# Altium PCB servoboard.PcbDoc
Units mil, origin at the board's own origin, x right, y up, seen from the top; angles counter-clockwise.
Board outline 3175.08 x 1402.53 mil, 2 copper layers (Top Layer, Bottom Layer); 56 components, 46 nets, 170 pads, 9 vias.
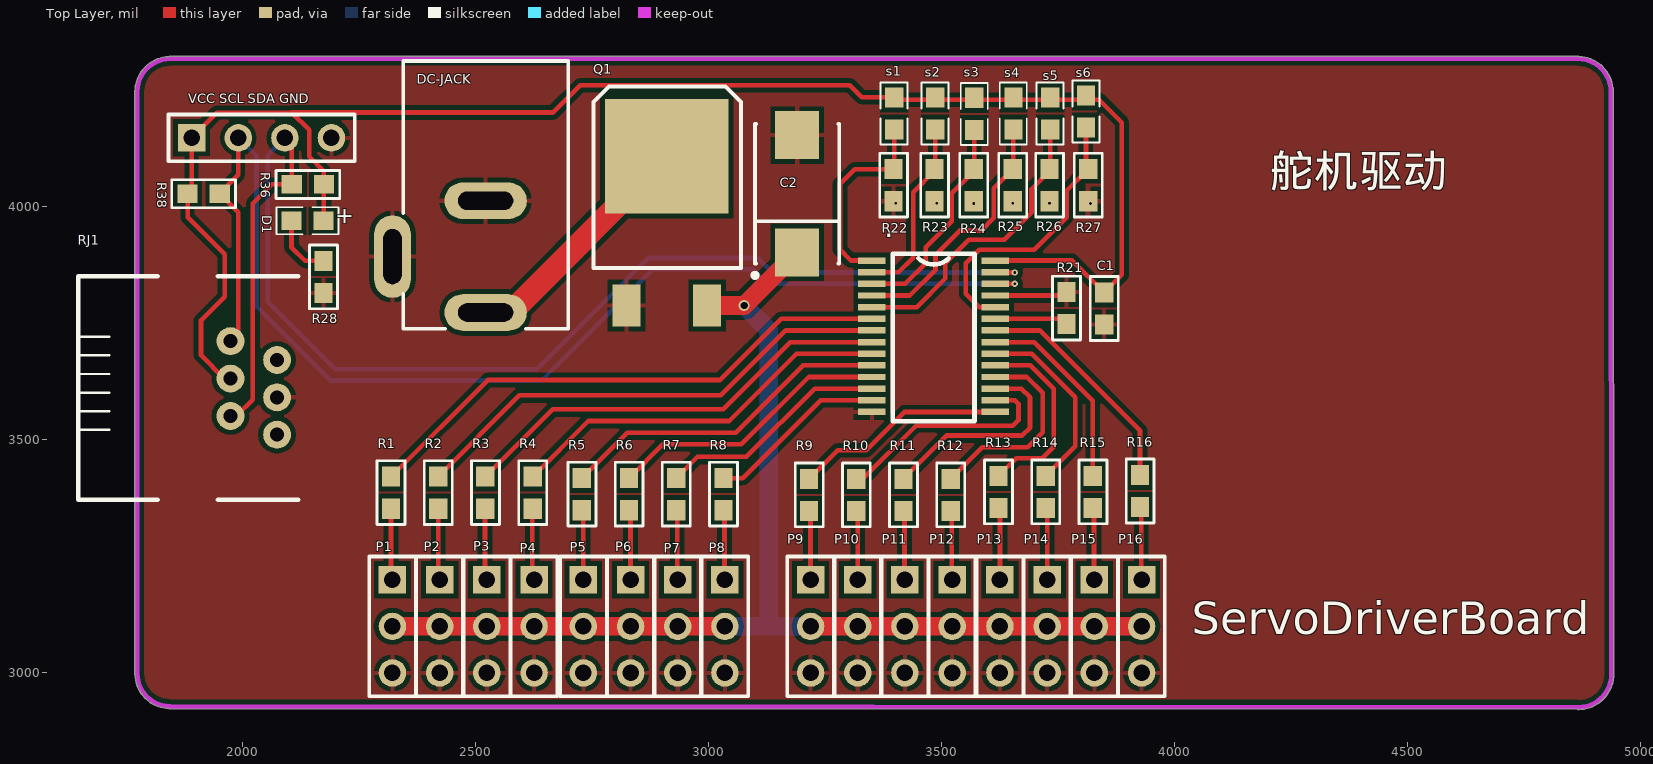
[diagram p0: Top Layer view]
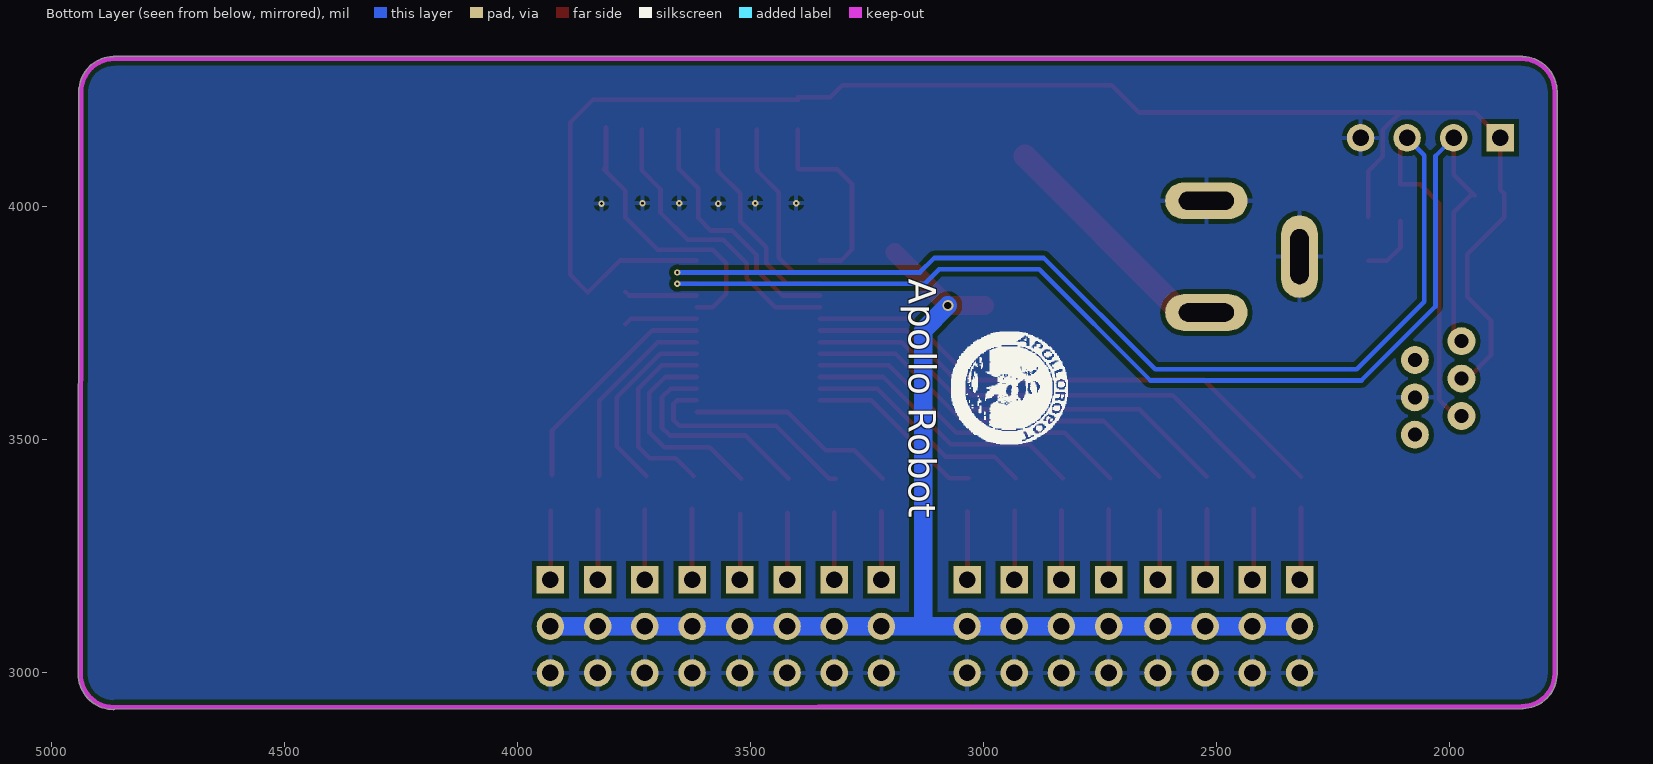
[diagram p1: Bottom Layer view, seen from below]

## Layer stack, top to bottom
Top Layer: signal copper 1.4
Dielectric: dielectric 12.6, FR-4, Dk 4.8
Bottom Layer: signal copper 1.4

## Board outline
1841.31,2922.52 cw(c1843.5,2998) 1768.01,2996.13 cw(c1772.95,2997) 1767.93,2997 1767.93,4247 cw(c1772.95,4247) 1767.99,4247.75 cw(c1843.5,4247) 1841.25,4322.48 cw(c1843.5,4318) 1843.5,4323.02 4866.5,4323.02 cw(c4866.5,4318) 4868.75,4322.48 cw(c4866.5,4247) 4941.5,4255.79 cw(c4936.82,4254) 4941.83,4254 4941.83,4252.23 cw(c4866.5,4247) 4942.02,4247 cw(c4937,4247) 4941.84,4245.69 4943.02,2996 cw(c4938,2996) 4943.02,2996 cw(c4867.5,2996) 4867.5,2920.49 cw(c4867.5,2925.5) 4866.03,2920.7 1843.5,2922.02 cw(c1843.5,2927.03)

## Design rules (kind name [scope] priority, off if disabled: settings)
Clearance [All] p1: gap=10
HoleSize [All] p1: absolutevalues=TRUE maxlimit=200 minlimit=1 maxpercent=80.000 minpercent=20.000
HoleToHoleClearance [All] p1: gap=0 allowstackedmicrovias=TRUE
MinimumSolderMaskSliver [All] p1: minsoldermaskwidth=0
PlaneClearance [All] p1: clearance=10
PolygonConnect [All] p1: connectstyle=Relief reliefconductorwidth=10 reliefentries=4 polygonreliefangle="90 Angle" airgapwidth=10
RoutingVias [All] p1: holewidth=28 width=50 viastyle="Through Hole" minholewidth=28 minwidth=50 maxholewidth=28 maxwidth=50
SilkToSilkClearance [All] p1: silktosilkclearance=0
SilkToSolderMaskClearance SilkscreenOverComponentPads [IsPad] p1: minsilkscreentomaskgap=0 clearancetoexposedcopper=TRUE
SolderMaskExpansion [All] p1: expansion=4
Width APOLLO [InPolygon] p1: maxlimit=50 minlimit=10 preferedwidth=10
Width [All] p2: maxlimit=1000 minlimit=10 preferedwidth=10
22 further rules are at their usual default settings.

## Components (designator, comment, footprint, x,y, rotation, side; value= is the part's Value field where it differs from the comment)
. "PCA9685PW" TSSOP-28 3483,3722 r0 top (schematic designator pp1)
C1 "Capacitor" C0805 3849,3747 r90 top
C2 "Cap Pol3" TC7343-E 3190,4028 r90 top
D1 "LED" C0603 2173,3970 r180 top (schematic designator LED1)
DC-JACK "3P" DC-JACK-005 2421,3893 r90 top
P1 "Header 3H" HDR1X3 2321,3199 r270 top
P2 "Header 3H" HDR1X3 2422.33,3199 r270 top
P3 "Header 3H" HDR1X3 2523.67,3199 r270 top
P4 "Header 3H" HDR1X3 2625,3199 r270 top
P5 "Header 3H" HDR1X3 2730.82,3199 r270 top
P6 "Header 3H" HDR1X3 2832.15,3199 r270 top
P7 "Header 3H" HDR1X3 2933.49,3199 r270 top
P8 "Header 3H" HDR1X3 3034.82,3199 r270 top
P9 "Header 3H" HDR1X3 3218.67,3199 r270 top
P10 "Header 3H" HDR1X3 3320,3199 r270 top
P11 "Header 3H" HDR1X3 3421.33,3199 r270 top
P12 "Header 3H" HDR1X3 3522.67,3199 r270 top
P13 "Header 3H" HDR1X3 3625.33,3199 r270 top
P14 "Header 3H" HDR1X3 3726.67,3199 r270 top
P15 "Header 3H" HDR1X3 3828,3199 r270 top
P16 "Header 3H" HDR1X3 3929.33,3199 r270 top
Q1 "AOD417" TO-252 2910,3788 r0 top
R1 "Resistor" R0603 2318,3351.82 r90 top
R2 "Resistor" R0603 2419.33,3351.82 r90 top
R3 "Resistor" R0603 2520.67,3351.82 r90 top
R4 "Resistor" R0603 2622,3351.82 r90 top
R5 "Resistor" R0603 2727.82,3348.58 r90 top
R6 "Resistor" R0603 2829.15,3348.58 r90 top
R7 "Resistor" R0603 2930.49,3348.58 r90 top
R8 "Resistor" R0603 3031.82,3348.58 r90 top
R9 "Resistor" R0603 3215.67,3347 r90 top
R10 "Resistor" R0603 3317,3347 r90 top
R11 "Resistor" R0603 3418.33,3347 r90 top
R12 "Resistor" R0603 3519.67,3347 r90 top
R13 "Resistor" R0603 3622.33,3353.3 r90 top
R14 "Resistor" R0603 3723.67,3353.3 r90 top
R15 "Resistor" R0603 3825,3353.3 r90 top
R16 "Resistor" R0603 3926.33,3355.3 r90 top
R21 "Resistor" R0603 3768,3817 r270 top
R22 "Resistor" R0603 3397,4012 r90 top
R23 "Resistor" R0603 3485,4012 r90 top
R24 "Resistor" R0603 3569,4012 r90 top
R25 "Resistor" R0603 3653,4012 r90 top
R26 "Resistor" R0603 3732,4012 r90 top
R27 "Resistor" R0603 3815,4012 r90 top
R28 "Resistor" R0603 2173,3815 r90 top
R36 "Resistor" R0603 2105,4048 r0 top
R38 "Resistor" R0603 1950,4028 r180 top
RJ1 "RJ12 port" RJ12-S-12X15X14.5 1973,3601 r270 top locked
s1 "shortcut" C0603 3398,4235 r270 top
s2 "shortcut" C0603 3486,4235 r270 top
s3 "shortcut" C0603 3570,4234 r270 top
s4 "shortcut" C0603 3654,4235 r270 top
s5 "shortcut" C0603 3733,4235 r270 top
s6 "shortcut" C0603 3810,4239 r270 top
"VCC SCL SDA GND" "HDR4" HDR1X4 1890,4148 r0 top (schematic designator HDR1)

## Footprints (in the part's own frame and the unit in brackets; to place one, negate y for a bottom-side part, rotate by r counter-clockwise, add the part's x,y. Pads: shape width x height; smd on the part's side, far side on the other; paste and mask are expansions set on the pad)
C0603 [mm] "Caparitor 0603"
  rect 1.1x1 smd: 1(0.001,0.006) 2(1.751,0.006)
  silkscreen extent -0.81,-0.74 2.57,0.74
C0805 [mm] "Caparitor 0805"
  rect 1.1x1 smd: 1(0,0) 2(1.75,0)
  silkscreen extent -0.86,-0.77 2.62,0.76
DC-JACK-005 [mm] "引脚针直径2.5mm, 插槽孔"
  oval 2x4.5 hole 1 slot 3 at 90 deg: 1(-3.048,-2.54) 2(3.048,-2.54)
  oval 4.5x2 hole 1 slot 3 at 0 deg: 3(0,2.54)
  silkscreen extent -3.93,-7.04 10.67,1.96, body extent -3.94,-6.98 10.67,1.91, height 11
HDR1X3 [mm]
  rect 1.5x1.5 hole 0.9: 1(0,0)
  round 1.5 hole 0.9: 2(2.54,0) 3(5.08,0)
  silkscreen extent -1.27,-1.27 6.35,1.27
HDR1X4 [mm]
  rect 1.5x1.5 hole 0.9: 1(0,0)
  round 1.5 hole 0.9: 2(2.54,0) 3(5.08,0) 4(7.62,0)
  silkscreen extent -1.27,-1.27 8.89,1.27
R0603 [mm] "Resistor 0603"
  rect 1.1x1 smd: 1(-0.003,0.005) 2(1.747,0.005)
  silkscreen extent -0.86,-0.76 2.62,0.76
RJ12-S-12X15X14.5 [mil] "RJ12 socket"
  round 94.49 on Mech1: 0(-246,-90.28) 1(226.22,-90.28)
  round 60 hole 30: 1(-110.39,0.28) 2(-70.24,100.28) 3(-30.08,0.28) 4(10.08,100.28) 5(50.24,0.28) 6(90.39,100.28)
  silkscreen extent -250,-326 230,146
TC7343-E [mm] "Capacitor, SM Tantalum; Body 7.3 x 4.3 mm (LxW typ)"
  rect 2.6x2.4 smd: 1(-3.2,0) 2(3.2,0)
  silkscreen extent -4.57,-2.3 3.8,2.42
TO-252 [mm] "DPAK"
  rect 1.524x2.28 smd: 1(-2.2,0) 3(2.2,0)
  rect 6.74x6.23 smd: 2(0,8.14)
  silkscreen extent -4,2.05 4.05,11.95, body extent -3.24,-0.5 3.26,10.5, height 2.2
TSSOP-28 [mil] "Shrink Small Outline; 28 Leads; Body Width 4.4 mm;"
  rect 59.06x13.78 smd: 1(-132.5,162.5) 2(-132.5,137.5) 3(-132.5,112.5) 4(-132.5,87.5) 5(-132.5,62.5) 6(-132.5,37.5) 7(-132.5,12.5) 8(-132.5,-12.5) 9(-132.5,-37.5) 10(-132.5,-62.5) 11(-132.5,-87.5) 12(-132.5,-112.5) 13(-132.5,-137.5) 14(-132.5,-162.5) 15(132.5,-162.5) 16(132.5,-137.5) 17(132.5,-112.5) 18(132.5,-87.5) 19(132.5,-62.5) 20(132.5,-37.5) 21(132.5,-12.5) 22(132.5,12.5) 23(132.5,37.5) 24(132.5,62.5) 25(132.5,87.5) 26(132.5,112.5) 27(132.5,137.5) 28(132.5,162.5)
  silkscreen extent -88,-182 88,178

## Part data
C2: "Polarized Capacitor (Surface Mount)"
D1: library part LED-SM, "LED  SMD"
P1 P2 P3 P4 P5 P6 P7 P8 P9 P10 P11 P12 P13 P14 P15 P16: "Header, 3-Pin, Right Angle"
Q1: library part MOSFET-P, "P-Channel MOSFET"
RJ1: library part RJ12
"VCC SCL SDA GND": library part HDR4-2.54mm, "Header  4pin"

## Free pads (board coordinates)
  round 196.85 on Mech1: 4(4122.3,3456.51) 4(4122.3,3771.47) 4(4437.26,3456.51) 4(4437.26,3771.47) 4(4752.22,3456.51) 4(4752.22,3771.47)

## Via types
v1: diameter 13.62, hole 5.75, Top Layer to Bottom Layer, 8 vias
v2: diameter 23.62, hole 15.75, Top Layer to Bottom Layer, 1 vias

## Nets (pads, with @x,y where several pads share a name; then routed paths per layer and width w, separated by ;. In a path a pad name is that pad's centre, name@x,y a point inside that pad or via, vN(x,y) a via of type N, cw(c..) or ccw(c..) an arc to the next point about the centre after c; other vN are vias at no path point)
A0: ..1 R22.2 s1.2 | length 433.1
  Top Layer w10: ..1 3305.5,3884.5 3282,3908 3282,4049 3313.78,4080.78 R22.2 3398.23,4082.19 s1.2
A1: ..2 R23.2 s2.2 | length 392.2
  Top Layer w10: ..2 3407.5,3859.5 3439,3891 3439,4030.96 R23.2@3484.82,4076.78 ; R23.2 3486.23,4082.19 s2.2
A2: ..3 R24.2 s3.2 | length 468.2
  Top Layer w10: ..3 3421.5,3834.5 3466,3879 3466,3913 3522,3969 3522,4028.96 R24.2@3568.82,4075.78 ; R24.2 R24.2@3568.82,4075.78 ; s3.2 3570.23,4077.19 R24.2@3568.82,4075.78
A3: ..4 R25.2 s4.2 | length 556.2
  Top Layer w10: ..4 3431.5,3809.5 3487,3865 3487,3897 3539,3949 3585,3949 3612,3976 3612,4039.96 R25.2 ; R25.2@3654.23,4080.78 s4.2
A4: ..5 R26.2 s5.2 | length 641.5
  Top Layer w10: ..5 3446.5,3784.5 3508,3846 3508,3879 3558,3929 3635,3929 3693,3987 3693,4037.96 3733.23,4078.19 s5.2
A5: ..24 R27.2 s6.2 | length 615
  Top Layer w10: ..24 3580.5,3784.5 3552,3813 3552,3879 3581,3908 3699,3908 3769,3978 3769,4034.96 R27.2@3810.23,4076.19 ; s6.2 R27.2@3810.23,4076.19 ; R27.2 R27.2@3810.23,4076.19
GND: "VCC SCL SDA GND.4" ..14 ..25 C1.1 C2.2 DC-JACK.2 DC-JACK.3 P1.3 P2.3 P3.3 P4.3 P5.3 P6.3 P7.3 P8.3 P9.3 P10.3 P11.3 P12.3 P13.3 P14.3 P15.3 P16.3 Q1.1 R21.1 R22.1 R23.1 R24.1 R25.1 R26.1 R27.1 R28.1 RJ1.4 | length 155.8
  Top Layer w10: ..25 3760.56,3809.5 R21.1
  other v1: 3568.82,4006.88 3819.82,4006.88 3401.82,4007.89 3489.82,4007.89 3652.82,4007.88 3731.82,4007.88
NetDC-JACK_1: DC-JACK.1 Q1.2 | length 528
  Top Layer w50: DC-JACK.1 2574.53,3773 Q1.2
NetLED1_2: D1.2 R28.2 | length 137.7
  Top Layer w10: D1.2 2104.08,3912.92 2133.22,3883.78 R28.2
NetP1_1: P1.1 R1.1 | length 151.7
  Top Layer w10: P1.1@2317.82,3202 R1.1@2317.82,3353.7
NetP2_1: P2.1 R2.1 | length 149.7
  Top Layer w10: P2.1@2419.15,3202 R2.1
NetP3_1: P3.1 R3.1 | length 151.7
  Top Layer w10: P3.1@2519.67,3199 R3.1@2519.67,3350.7
NetP4_1: P4.1 R4.1 | length 149.7
  Top Layer w10: P4.1@2621,3199 R4.1@2621,3348.7
NetP5_1: P5.1 R5.1 | length 151.7
  Top Layer w10: P5.1 R5.1@2730.82,3350.7
NetP6_1: P6.1 R6.1 | length 149.7
  Top Layer w10: P6.1 R6.1@2832.15,3348.7
NetP7_1: P7.1 R7.1 | length 151.7
  Top Layer w10: P7.1@2932.67,3196 R7.1@2932.67,3347.7
NetP8_1: P8.1 R8.1 | length 149.7
  Top Layer w10: P8.1@3034,3196 R8.1@3034,3345.7
NetP9_1: P9.1 R9.1 | length 151.7
  Top Layer w10: P9.1@3218.67,3194 R9.1@3218.67,3345.7
NetP10_1: P10.1 R10.1 | length 149.7
  Top Layer w10: P10.1@3320,3194 R10.1@3320,3343.7
NetP11_1: P11.1 R11.1 | length 151.7
  Top Layer w10: P11.1@3420.51,3191 R11.1@3420.51,3342.7
NetP12_1: P12.1 R12.1 | length 149.7
  Top Layer w10: P12.1@3521.85,3191 R12.1@3521.85,3340.7
NetP13_1: P13.1 R13.1 | length 151.7
  Top Layer w10: P13.1@3625.33,3200.3 R13.1@3625.33,3352
NetP14_1: P14.1 R14.1 | length 149.7
  Top Layer w10: P14.1@3726.67,3200.3 R14.1@3726.67,3350
NetP15_1: P15.1 R15.1 | length 151.7
  Top Layer w10: P15.1@3827.18,3197.3 R15.1@3827.18,3349
NetP16_1: P16.1 R16.1 | length 149.7
  Top Layer w10: P16.1@3928.51,3197.3 R16.1@3928.51,3347
OE: ..23 R21.2 | length 157.4
  Top Layer w10: ..23 3756.9,3759.5 R21.2
PWM0: ..6 R1.2 | length 1173.1
  Top Layer w10: R1.2 2525.22,3628 3024,3628 3155.5,3759.5 ..6
PWM1: ..7 R2.2 | length 1061.4
  Top Layer w10: R2.2 2593.55,3595 3026,3595 3165.5,3734.5 ..7
PWM2: ..8 R3.2 | length 949.7
  Top Layer w10: R3.2 2664.89,3565 3031,3565 3175.5,3709.5 ..8
PWM3: ..9 R4.2 | length 838
  Top Layer w10: R4.2 2741.22,3540 3044,3540 3188.5,3684.5 ..9
PWM4: ..10 R5.2 | length 723.2
  Top Layer w10: R5.2 2825.28,3515 3058,3515 3202.5,3659.5 ..10
PWM5: ..11 R6.2 | length 611.5
  Top Layer w10: R6.2 2901.61,3490 3070,3490 3214.5,3634.5 ..11
PWM6: ..12 R7.2 | length 499.8
  Top Layer w10: R7.2 2975.94,3463 3081,3463 3227.5,3609.5 ..12
PWM7: ..13 R8.2 | length 388.1
  Top Layer w10: R8.2 3073.36,3417.36 3240.5,3584.5 ..13
PWM8: ..15 R9.2 | length 459.5
  Top Layer w10: R9.2 3276.71,3477 3338,3477 3420.5,3559.5 ..15
PWM9: ..16 R10.2 | length 488.1
  Top Layer w10: R10.2 3330.78,3415.78 3445,3530 3653,3530 3665,3542 3665,3577 3657.5,3584.5 ..16
PWM10: ..17 R11.2 | length 464.7
  Top Layer w10: R11.2 3511.37,3509 3673,3509 3690,3526 3690,3591 3671.5,3609.5 ..17
PWM11: ..18 R12.2 | length 439
  Top Layer w10: R12.2 3587.71,3484 3685,3484 3717,3516 3717,3600.28 3682.78,3634.5 ..18
PWM12: ..19 R13.2 | length 415.3
  Top Layer w10: ..19 3690.5,3659.5 3741,3609 3741,3485 3716,3460 3660.07,3460 R13.2
PWM13: ..20 R14.2 | length 405.6
  Top Layer w10: ..20 3693.78,3684.5 3787,3591.28 3787,3485.59 R14.2
PWM14: ..21 R15.2 | length 422.9
  Top Layer w10: ..21 3698.78,3709.5 3824.82,3583.47 R15.2
PWM15: ..22 R16.2 | length 494.9
  Top Layer w10: ..22 3710.78,3734.5 3926.15,3519.13 R16.2
SCL: "VCC SCL SDA GND.2" ..26 R38.1 RJ1.1@1973.28,3711.39 | length 2707.8
  Top Layer w10: R38.1@1945.18,4024.12 1990,4068.94 1990,4148 ; R38.1 1990,3987.94 1990,3728.12 RJ1.1@1973.28,3711.39 ; ..26 3616,3835 v1(3657,3835)
  Bottom Layer w10: 1990,4148 2029,4109 2029,3786.06 2188.06,3627 2641,3627 2880,3866 3095,3866 3126,3835 v1(3657,3835)
SDA: "VCC SCL SDA GND.3" ..27 R36.1 RJ1.5 | length 2853.4
  Top Layer w10: RJ1.5 1985.76,3550.76 2021,3586 2021,4007 2062.18,4048.18 R36.1 2104.88,4133.12 ; ..27@3616,3859 v1(3657,3859)
  Bottom Layer w10: 2090,4148 2053,4111 2053,3796 2198,3651 2631.06,3651 2870.06,3890 3104.94,3890 3135.94,3859 v1(3657,3859)
VCC: "VCC SCL SDA GND.1" ..28 C1.2 D1.1 R36.2 R38.2 RJ1.3 s1.1 s2.1 s3.1 s4.1 s5.1 s6.1 | length 3580.2
  Top Layer w10: RJ1.3 1959.92,3631.08 1910,3681 1910,3756 1961,3807 1961,3898 1881.22,3977.78 R38.2 1890,4036.6 1890,4148 1944,4202 2105,4202 2142,4165 2142,4108 2173.78,4076.22 R36.2 D1.1@2173.78,3978.08 ; 2104.63,4202.37 2665.37,4202.37 2724,4261 3303,4261 3329.02,4234.98 s1.1 ; s1.1@3397,4229.98 3838.02,4229.98 3887,4181 3887,3853.9 C1.2 3780.4,3884.5 ..28
VM: C2.1 P1.2 P2.2 P3.2 P4.2 P5.2 P6.2 P7.2 P8.2 P9.2 P10.2 P11.2 P12.2 P13.2 P14.2 P15.2 P16.2 Q1.3 | length 3962.4
  Top Layer w40: P1.2 P2.2 P3.2 P4.2 P5.2 P6.2 P7.2 P8.2 ; Q1.3 v2(3075.98,3788) C2.1 ; P9.2 P10.2 P11.2 P12.2 P13.2 P14.2 P15.2 P16.2
  Bottom Layer w40: P1.2 P2.2 P3.2 P4.2 P5.2 P6.2 P7.2 P8.2 P9.2 P10.2 P11.2 P12.2 P13.2 P14.2 P15.2 P16.2 ; v2(3075.98,3788) 3129,3734.98 3129,3121
pads on no net: RJ1.0 RJ1.1@1882.72,3374.78 RJ1.2 RJ1.6

## Polygon pours and split planes (outlines as drawn)
GND on Top Layer "Top Layer-No Net" (solid, pour order 0): 1841.31,2922.52 cw(c1843.5,2998) 1768.01,2996.13 cw(c1772.95,2997) 1767.93,2997 1767.93,4247 cw(c1772.95,4247) 1767.99,4247.75 cw(c1843.5,4247) 1841.25,4322.48 cw(c1843.5,4318) 1843.5,4323.02 4866.5,4323.02 cw(c4866.5,4318) 4868.75,4322.48 cw(c4866.5,4247) 4941.5,4255.79 cw(c4936.82,4254) 4941.83,4254 4941.83,4252.23 cw(c4866.5,4247) 4942.02,4247 cw(c4937,4247) 4941.84,4245.69 4943.02,2996 cw(c4938,2996) 4943.02,2996 cw(c4867.5,2996) 4867.5,2920.49 cw(c4867.5,2925.5) 4866.03,2920.7 1843.5,2922.02 cw(c1843.5,2927.03)
GND on Bottom Layer "Top Layer-No Net" (solid, pour order 1): 1841.31,2922.52 cw(c1843.5,2998) 1768.01,2996.13 cw(c1772.95,2997) 1767.93,2997 1767.93,4247 cw(c1772.95,4247) 1767.99,4247.75 cw(c1843.5,4247) 1841.25,4322.48 cw(c1843.5,4318) 1843.5,4323.02 4866.5,4323.02 cw(c4866.5,4318) 4868.75,4322.48 cw(c4866.5,4247) 4941.5,4255.79 cw(c4936.82,4254) 4941.83,4254 4941.83,4252.23 cw(c4866.5,4247) 4942.02,4247 cw(c4937,4247) 4941.84,4245.69 4943.02,2996 cw(c4938,2996) 4943.02,2996 cw(c4867.5,2996) 4867.5,2920.49 cw(c4867.5,2925.5) 4866.03,2920.7 1843.5,2922.02 cw(c1843.5,2927.03)

## Keep-outs
Keep-Out Layer:
  lines w10: 1772.95,2997 1772.95,4247 ; 1773,2998 ccw(c1843.5,2998) 1843.5,2927.5 ; 1773,4247 cw(c1843.5,4247) 1843.5,4317.5 ; 1843.5,2927.03 4867.5,2925.72 ; 1843.5,4318 4866.5,4318 ; 4866.5,4317.5 cw(c4866.5,4247) 4937,4247 ; 4867.5,2925.5 ccw(c4867.5,2996) 4938,2996 4936.82,4254 ; 6525,6920 cw(c6642.5,6912.5) 6650,7030 ; 7200,7030 cw(c7200,6915) 7315,6915

## Silkscreen, mask and mechanical layers (free items; w line width, h text height)
Top Overlay:
  text "舵机驱动" at 4205,4019 h120
  text "+" at 2245,3959 h60 r90
  text "ServoDriverBoard" at 4037,3059 h120
Bottom Overlay:
  drawing of 1376 lines, arcs and shapes, not listed
  text "Apollo Robot" at 3179,3846 h100 r90

## Dimensions
1772.95,4247 to 4936.82,4254 on Top Overlay
4866.5,4318 to 4867.5,2925.72 on Top Overlay